# Altium PCB UI_PCB.PcbDoc (part 4 of 5)
Units mm, origin at the board's own origin, x right, y up, seen from the top; angles counter-clockwise.
Board outline 164.97 x 129.99 mm, 4 copper layers (SIG/PWR1, GND1, GNS2, SIG/PWR2), stack 1.18 mm thick; 237 components, 216 nets, 913 pads, 655 vias.
Unrouted connection lines stored in the file: 177.
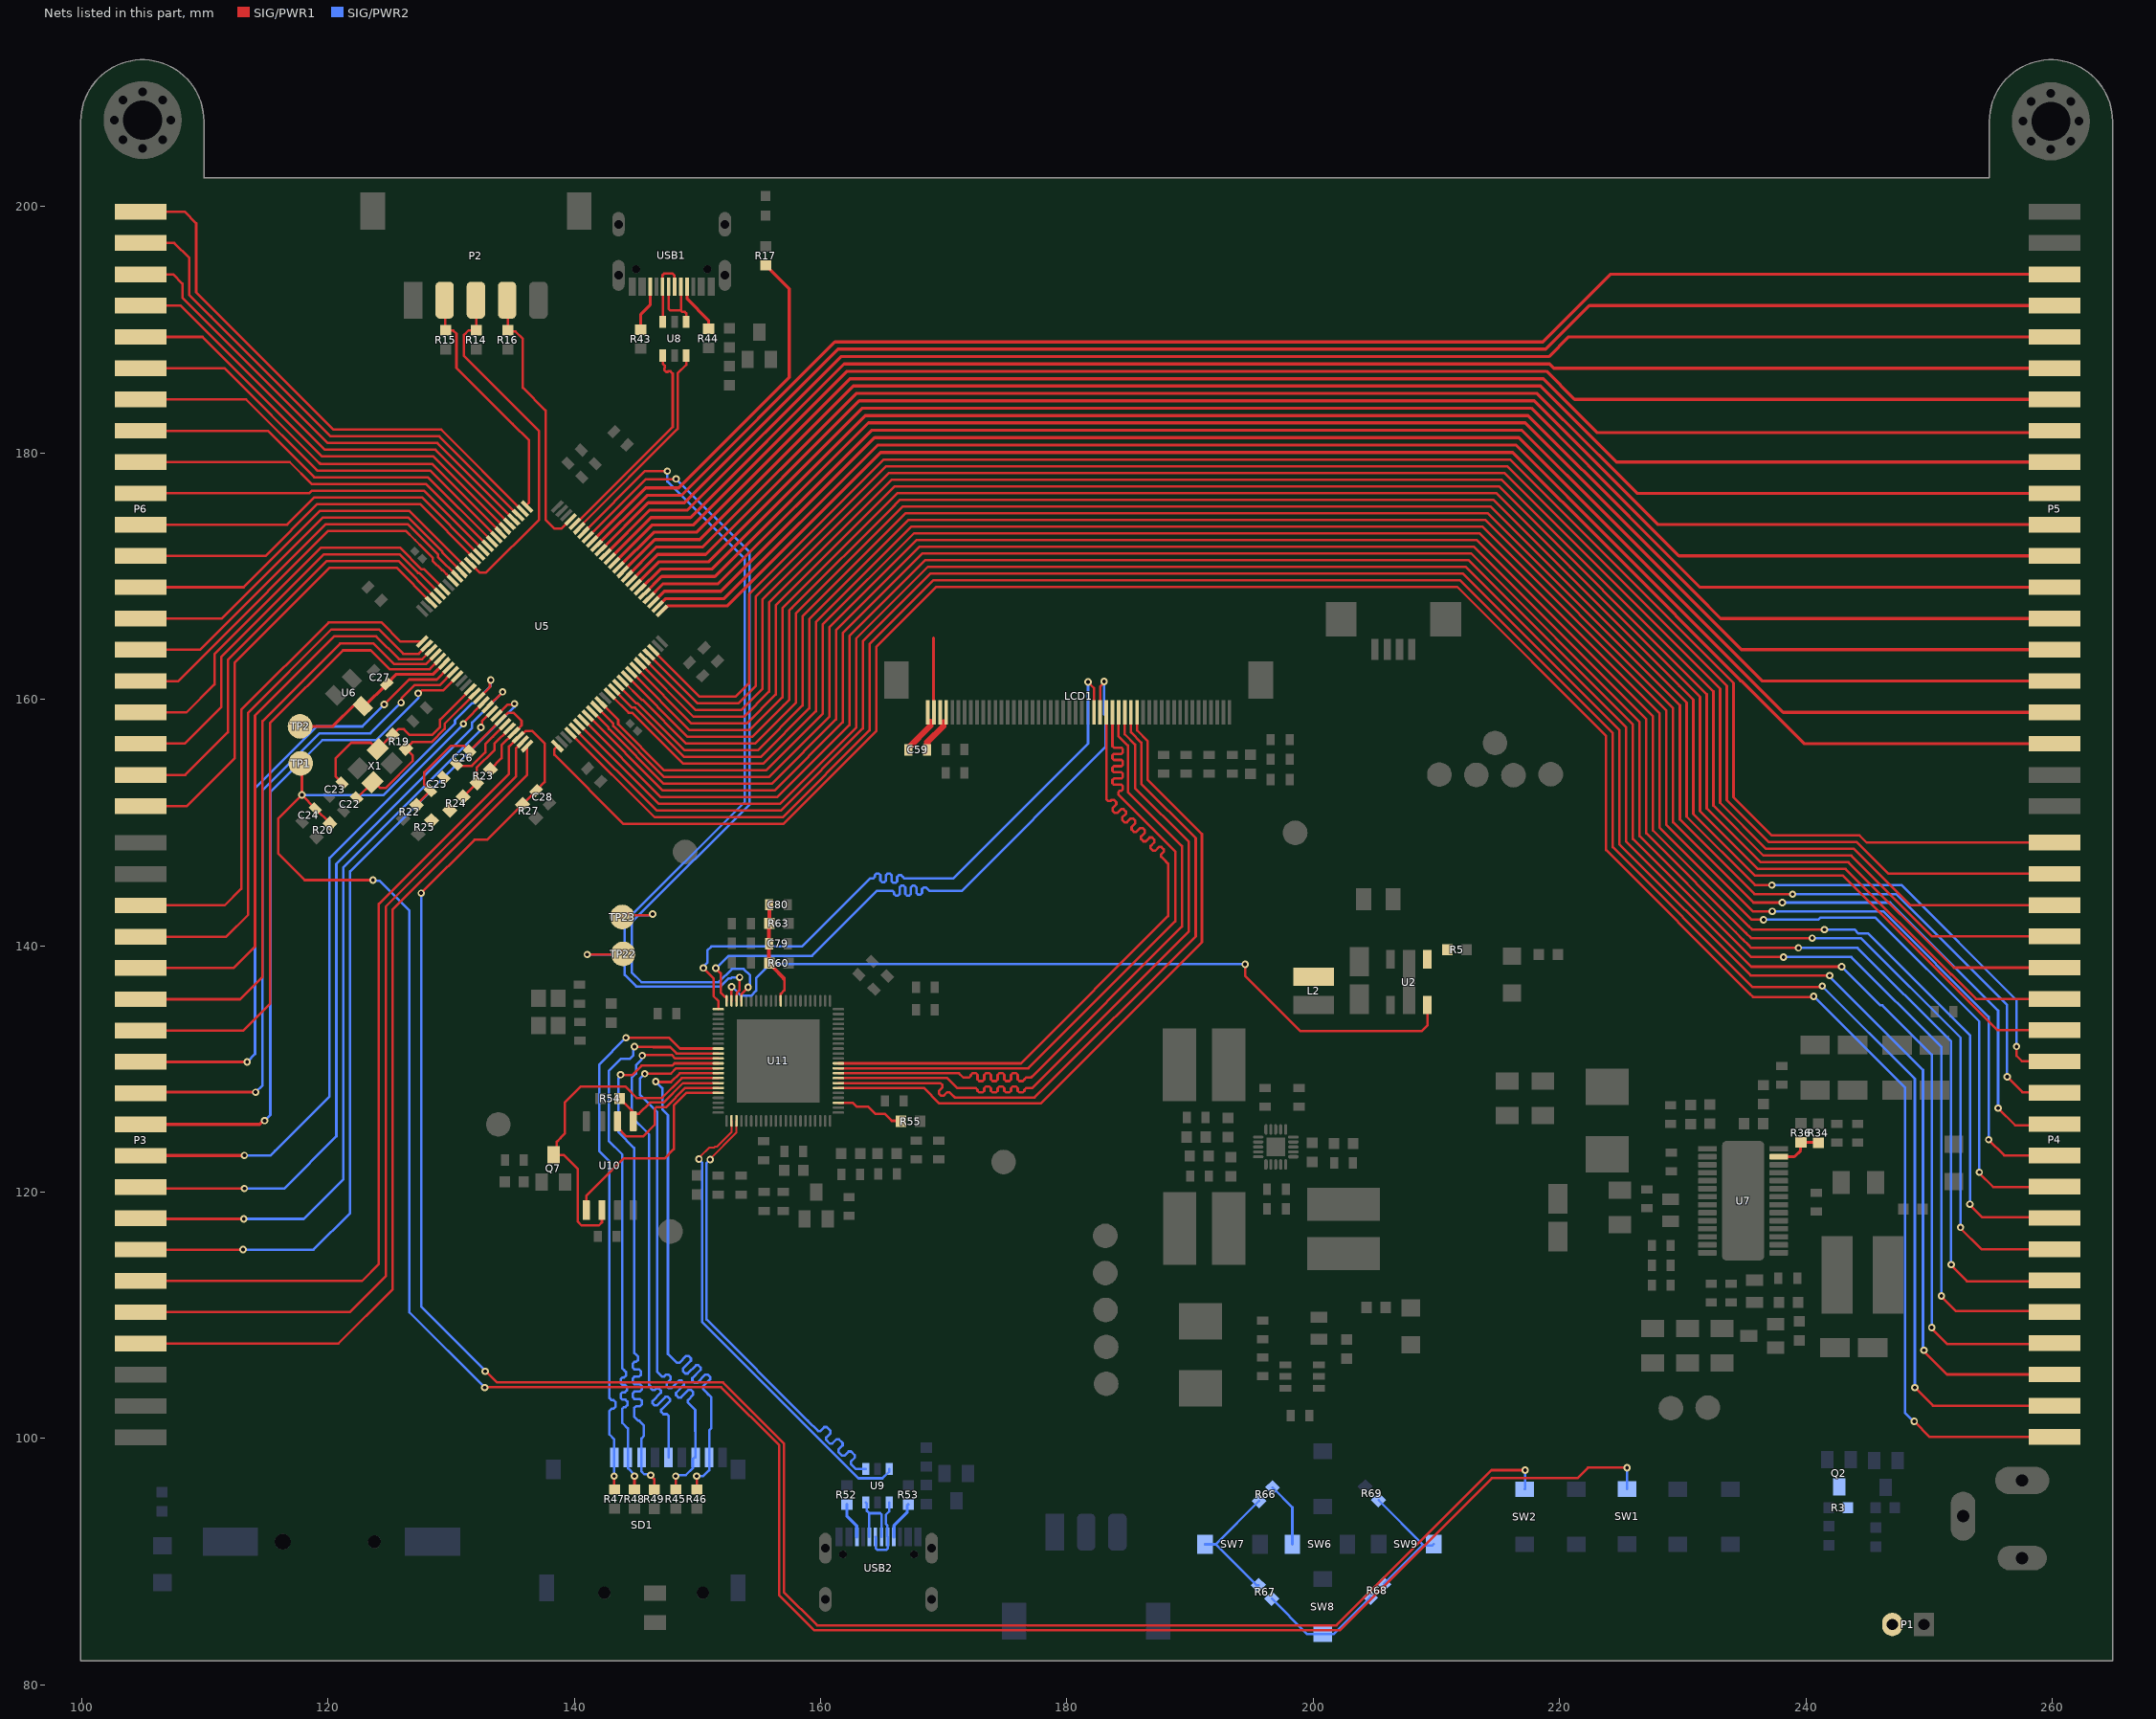
[diagram p5: the nets of this part, all layers, seen from the top]

## Via types
v1: diameter 0.6, hole 0.3, SIG/PWR1 to SIG/PWR2, tented both sides, 644 vias
v2: diameter 0.6, hole 0.3, SIG/PWR1 to SIG/PWR2, tented bottom, 10 vias
v3: diameter 0.8, hole 0.4, SIG/PWR1 to SIG/PWR2, tented both sides, 1 vias

## Nets (pads, with @x,y where several pads share a name; then routed paths per layer and width w, separated by ;. In a path a pad name is that pad's centre, name@x,y a point inside that pad or via, vN(x,y) a via of type N, cw(c..) or ccw(c..) an arc to the next point about the centre after c; other vN are vias at no path point) (continued)
NetR34_1: R34.1 R36.2 U7.13 | length 4.1
  SIG/PWR1 w0.254: U7.13@237.798,122.881 239.06,122.881 239.563,123.383 239.563,124.005 R36.2@239.598,124.041 240.995,124.041 R34.1@241.021,124.015
NetR43_1: R43.1 USB1.B5 | length 3.8
  SIG/PWR1 w0.254: R43.1@145.39,190.03 145.39,191.262 146.157,192.029 USB1.B5@146.157,193.509
NetR44_1: R44.1 USB1.A5 | length 4.2
  SIG/PWR1 w0.254: USB1.A5@149.157,193.509 149.157,192.514 150.901,190.769 R44.1@150.901,190.081
NetR52_1: R52.1 USB2.B5 | length 3
  SIG/PWR2 w0.254: R52.1@162.128,94.653 162.128,93.726 162.929,92.926 162.929,92.03 USB2.B5@162.946,92.013
NetR53_1: R53.1 USB2.A5 | length 3.1
  SIG/PWR2 w0.254: USB2.A5@165.946,92.013 165.957,92.024 165.957,92.932 167.021,93.996 167.021,94.567 R53.1@167.107,94.653
NetR55_2: R55.2 U11.3 | length 5.7
  SIG/PWR1 w0.2: U11.3@161.438,127.259 162.605,127.259 162.916,126.949 163.855,126.949 164.44,126.365 165.202,126.365 165.774,125.793 166.498,125.793 R55.2@166.535,125.755
NetR66_1: R66.1 SW6.1 | length 5.3
  SIG/PWR2 w0.2: R66.1@196.687,96.027 198.298,94.416 SW6.1@198.298,91.415
NetR66_2: R66.2 R67.1 SW7.1 | length 10.7
  SIG/PWR2 w0.2: SW7.1@191.211,91.415 192.075,91.415 ; R67.1@195.54,88.102 195.388,88.102 192.075,91.415 ; R66.2@195.591,94.931 192.075,91.415
NetR67_2: R67.2 R68.1 SW8.1 | length 10.4
  SIG/PWR2 w0.2: R67.2@196.636,87.006 199.517,84.125 SW8.1@200.762,84.125 201.651,84.125 R68.1@204.633,87.107
NetR68_2: R68.2 R69.1 SW9.1 | length 11.1
  SIG/PWR2 w0.2: R69.1@205.297,95.007 208.991,91.313 ; R68.2@205.729,88.203 208.839,91.313 208.991,91.313 ; SW9.1@209.525,91.313 208.991,91.313 ; SW9.1@209.779,91.44 209.652,91.313 208.991,91.313
PA0: C28.2 P3.15 R27.2 SW2.1 U5.23 | length 234.8
  SIG/PWR1 w0.2: P3.15@104.8,112.801 122.758,112.801 124.13,114.173 124.13,143.408 134.696,153.975 134.696,156.175 U5.23@135.444,156.923 135.529,156.923 136.061,157.455 136.576,157.455 137.589,156.442 137.589,153.297 C28.2@136.901,152.609 R27.2@135.783,151.491 132.907,148.615 131.902,148.615 v1(127.565,144.279) ; v1@132.791,105.486 133.728,104.549 152.068,104.549 157.02,99.598 157.02,87.526 159.71,84.836 201.88,84.836 214.479,97.434 v1(217.195,97.434)
  SIG/PWR2 w0.2: v1(127.565,144.279) 127.565,110.712 132.766,105.512 v1(132.766,105.461) ; SW2.1@217.17,95.885 217.195,95.91 v1(217.195,97.434)
PA1: P3.16 U5.24 | length 69.1
  SIG/PWR1 w0.2: P3.16@104.8,110.261 121.768,110.261 124.689,113.182 124.689,143.18 135.28,153.772 135.28,156.052 U5.24@135.798,156.569
PA2: P3.17 U5.25 | length 70.9
  SIG/PWR1 w0.2: P3.17@104.8,107.721 120.853,107.721 125.247,112.116 125.247,142.951 136.151,153.855 U5.25@136.151,156.215
PA3: P4.01 U5.26 | length 186.4
  SIG/PWR1 w0.2: U5.26@138.618,156.207 138.379,155.969 138.379,155.503 143.997,149.885 156.972,149.885 164.515,157.428 164.515,164.261 169.393,169.139 211.684,169.139 223.776,157.046 223.776,147.778 235.447,136.108 235.707,135.847 240.579,135.847 v1(240.63,135.899) ; v1(248.793,101.397) 250.063,100.127 P4.01@260.198,100.127
  SIG/PWR2 w0.2: v1(240.63,135.899) 248.031,128.497 248.031,102.108 248.742,101.397 v1(248.793,101.397)
PA4: P4.02 U5.29 | length 183.4
  SIG/PWR1 w0.2: U5.29@139.687,157.276 146.533,150.43 156.907,150.43 163.97,157.493 163.97,164.486 169.167,169.683 211.909,169.683 224.321,157.271 224.321,148.004 235.673,136.652 241.249,136.652 v1(241.325,136.728) ; v1(248.844,104.14) 250.317,102.667 P4.02@260.198,102.667
  SIG/PWR2 w0.2: v1(241.325,136.728) 248.844,129.21 v1(248.844,104.14)
PA5: P4.03 U5.30 | length 180.8
  SIG/PWR1 w0.2: U5.30@140.04,157.63 146.696,150.974 156.765,150.974 163.426,157.635 163.426,164.712 168.942,170.227 212.135,170.227 224.865,157.497 224.865,148.229 235.505,137.59 v1(241.933,137.59) ; v1(249.58,107.163) 249.58,107.086 251.46,105.207 P4.03@260.198,105.207
  SIG/PWR2 w0.2: v1(241.933,137.59) 241.933,137.492 249.504,129.921 249.504,107.163 v1(249.58,107.163)
PA6: P4.04 U5.31 | length 179.3
  SIG/PWR1 w0.2: U5.31@140.394,157.983 140.565,157.812 146.858,151.519 156.702,151.519 162.881,157.698 162.881,164.937 168.716,170.772 212.36,170.772 225.41,157.722 225.41,148.455 235.562,138.303 v1(242.9,138.303) ; v1(250.215,109.017) 250.215,108.941 251.485,107.671 260.121,107.671 P4.04@260.198,107.747
  SIG/PWR2 w0.2: v1(242.9,138.303) 246.037,135.166 246.206,135.166 250.215,131.157 v1(250.215,109.017)
PA7: P4.05 U5.32 | length 176.8
  SIG/PWR1 w0.2: U5.32@140.747,158.337 147.021,152.063 156.476,152.063 162.337,157.924 162.337,165.163 168.491,171.316 212.586,171.316 225.954,157.948 225.954,148.681 235.544,139.09 v1(238.176,139.09) ; v1(251.003,111.582) 251.003,111.506 252.171,110.338 260.147,110.338 P4.05@260.198,110.287
  SIG/PWR2 w0.2: v1(238.176,139.09) 243.688,139.09 251.003,131.775 v1(251.003,111.582)
PA15: P6.01 U5.77 | length 44.3
  SIG/PWR1 w0.2: P6.01@104.8,199.593 108.356,199.593 109.296,198.653 109.296,193.054 120.451,181.899 129.206,181.899 U5.77@135.798,175.307
PB0: P4.08 U5.35 | length 169.4
  SIG/PWR1 w0.2: U5.35@141.808,159.397 143.154,158.051 143.154,157.836 147.294,153.696 155.8,153.696 160.704,158.6 160.704,165.839 167.814,172.95 213.262,172.95 227.587,158.624 227.587,149.357 235.361,141.584 235.625,141.319 v1(241.503,141.319) ; v1(253.314,119.024) 253.314,118.948 254.305,117.958 260.147,117.958 P4.08@260.198,117.907
  SIG/PWR2 w0.2: v1(241.503,141.319) 243.948,141.319 244.272,140.995 245.059,140.995 253.314,132.74 v1(253.314,119.024)
PB1: P4.09 U5.36 | length 167.5
  SIG/PWR1 w0.2: U5.36@142.162,159.751 143.561,158.352 143.561,157.988 147.308,154.241 155.574,154.241 160.159,158.826 160.159,166.065 167.589,173.494 213.488,173.494 228.132,158.85 228.132,149.583 235.586,142.128 236.553,142.128 v1(236.553,142.118) ; v1(254.076,121.615) 254.076,121.539 255.194,120.421 260.172,120.421 P4.09@260.198,120.447
  SIG/PWR2 w0.2: v1@236.558,142.123 236.563,142.118 241.002,142.118 241.187,142.303 245.631,142.303 254.076,133.858 v1(254.076,121.615)
PB4: P6.13 U5.90 | length 30.9
  SIG/PWR1 w0.2: P6.13@104.8,169.113 113.152,169.113 119.358,175.318 126.594,175.318 U5.90@131.201,170.711
PB5: P6.14 U5.91 | length 31.3
  SIG/PWR1 w0.2: P6.14@104.8,166.573 111.382,166.573 119.583,174.774 126.516,174.774 129.286,172.004 129.286,171.919 U5.91@130.848,170.358
PB6: P6.15 U5.92 | length 31.8
  SIG/PWR1 w0.2: P6.15@104.8,164.033 109.612,164.033 119.809,174.23 126.481,174.23 128.93,171.78 128.93,171.568 U5.92@130.494,170.004
PB7: P6.16 U5.93 | length 32.2
  SIG/PWR1 w0.2: P6.16@104.8,161.493 107.842,161.493 110.232,163.883 120.034,173.685 125.984,173.685 126.325,173.685 127.07,172.94 127.712,172.298 128.499,171.511 128.499,171.245 129.247,170.497 129.295,170.497 129.611,170.18 129.931,169.86 U5.93@130.141,169.651
PB8: P6.17 U5.95 | length 33
  SIG/PWR1 w0.2: P6.17@104.8,158.953 108.509,158.953 110.776,161.221 110.776,163.657 119.44,172.321 125.849,172.321 127.61,170.561 127.816,170.561 U5.95@129.434,168.943
PB9: P6.18 U5.96 | length 34.3
  SIG/PWR1 w0.2: P6.18@104.8,156.413 108.356,156.413 111.321,159.377 111.321,163.432 119.666,171.777 125.632,171.777 125.808,171.777 127.316,170.269 127.401,170.269 U5.96@129.08,168.59
PB10: P4.19 U5.47 | length 147.1
  SIG/PWR1 w0.2: U5.47@146.051,163.64 150.006,159.685 153.319,159.685 154.715,161.081 154.715,168.32 165.333,178.938 215.743,178.938 233.576,161.105 233.576,151.838 236.997,148.417 244.129,148.417 246.699,145.847 P4.19@260.198,145.847
PB11: P4.20 U5.48 | length 145.9
  SIG/PWR1 w0.2: U5.48@146.404,163.994 150.168,160.229 153.094,160.229 154.171,161.306 154.171,168.545 165.108,179.483 215.968,179.483 234.12,161.33 234.12,152.063 237.223,148.961 244.355,148.961 244.929,148.387 P4.20@260.198,148.387
PB12: P5.03 U5.51 | length 128.2
  SIG/PWR1 w0.254: U5.51@147.111,167.176 147.158,167.176 147.572,167.589 152.406,167.589 164.871,180.054 213.557,180.054 216.205,180.054 224.151,172.108 234.692,161.567 234.692,161.515 234.744,161.515 235.963,160.296 239.846,156.413 P5.03@260.198,156.413
PB13: P5.04 U5.52 | length 127.9
  SIG/PWR1 w0.254: U5.52@146.758,167.529 147.416,168.188 152.159,168.188 164.623,180.652 213.805,180.652 216.453,180.652 224.75,172.355 234.992,162.113 236.211,160.895 238.152,158.953 P5.04@260.198,158.953
PB14: P5.05 U5.53 | length 127.5
  SIG/PWR1 w0.254: U5.53@146.404,167.883 147.308,168.786 151.911,168.786 164.376,181.251 214.053,181.251 216.701,181.251 223.541,174.411 230.634,167.318 235.24,162.711 236.458,161.493 P5.05@260.198,161.493
PB15: P5.06 U5.54 | length 127.2
  SIG/PWR1 w0.254: U5.54@146.051,168.236 147.199,169.384 151.663,169.384 164.128,181.849 216.949,181.849 224.139,174.659 234.765,164.033 P5.06@260.198,164.033
PC0: P3.11 U5.15 | length 54.5
  SIG/PWR1 w0.2: v1(130.995,158.019) 130.995,158.13 U5.15@132.616,159.751
  SIG/PWR1 w0.254: P3.11@104.8,122.961 104.826,122.987 v1(113.208,122.987)
  SIG/PWR2 w0.2: v1(113.208,122.987) 115.341,122.987 115.706,123.351 120.117,127.762 120.117,147.14 v1(130.995,158.019)
PC1: P3.12 U5.16 | length 61.1
  SIG/PWR1 w0.2: P3.12@104.8,120.421 104.927,120.294 v1(113.208,120.294) ; U5.16@132.969,159.397 132.969,159.404 v1@134.18,160.615
  SIG/PWR2 w0.2: v1(113.208,120.294) 116.434,120.294 120.675,124.536 120.675,146.66 131.699,157.683 131.699,158.132 v1(134.182,160.615)
PC2: P3.13 U5.17 | length 60.5
  SIG/PWR1 w0.2: v1@132.436,157.785 132.502,157.851 132.502,158.223 U5.17@133.323,159.044
  SIG/PWR1 w0.254: P3.13@104.8,117.881 104.851,117.831 v1(113.157,117.831)
  SIG/PWR2 w0.2: v1(113.157,117.831) 118.034,117.831 121.234,121.031 121.234,146.355 v1@132.379,157.5
  other v1: 132.41,157.734
PC3: P3.14 U5.18 | length 67
  SIG/PWR1 w0.2: P3.14@104.8,115.341 v1(113.106,115.341) ; U5.18@133.676,158.69 134.568,159.582 135.076,159.582 v1(135.142,159.648)
  SIG/PWR2 w0.2: v1(113.106,115.341) 118.821,115.341 121.793,118.313 121.793,146.05 135.142,159.399 v1(135.142,159.648)
PC4: P4.06 U5.33 | length 174.4
  SIG/PWR1 w0.2: U5.33@141.101,158.69 147.184,152.608 156.251,152.608 161.792,158.149 161.792,165.388 168.265,171.861 212.811,171.861 226.499,158.173 226.499,148.906 234.283,141.121 234.91,140.495 235.326,140.079 235.574,139.831 v1(239.39,139.831) ; v1(251.79,114.122) 251.79,114.046 253.06,112.776 260.147,112.776 P4.06@260.198,112.827
  SIG/PWR2 w0.2: v1(239.39,139.831) 244.192,139.831 251.79,132.232 v1(251.79,114.122)
PC5: P4.07 U5.34 | length 171.6
  SIG/PWR1 w0.2: U5.34@141.454,159.044 142.773,157.725 142.773,157.658 142.804,157.627 142.804,157.614 147.267,153.152 156.025,153.152 161.248,158.375 161.248,165.614 168.04,172.405 213.037,172.405 227.043,158.399 227.043,149.132 235.135,141.039 235.552,140.623 v1(240.513,140.623) ; v1(252.552,117.145) 252.552,117.069 254.254,115.367 P4.07@260.198,115.367
  SIG/PWR2 w0.2: v1(240.513,140.623) 244.466,140.623 252.552,132.537 v1(252.552,117.145)
PC6: P5.15 U5.63 | length 124
  SIG/PWR1 w0.254: U5.63@142.869,171.418 146.221,174.77 149.432,174.77 161.897,187.235 219.179,187.235 219.521,186.893 P5.15@260.198,186.893
PC7: P5.16 U5.64 | length 125
  SIG/PWR1 w0.254: U5.64@142.515,171.772 146.112,175.369 149.184,175.369 161.649,187.834 219.126,187.834 220.726,189.433 P5.16@260.198,189.433
PC8: P5.17 U5.65 | length 126.3
  SIG/PWR1 w0.254: U5.65@142.162,172.125 146.003,175.967 148.936,175.967 161.401,188.432 161.528,188.432 218.879,188.432 222.42,191.973 P5.17@260.198,191.973
PC9: P5.18 U5.66 | length 127.5
  SIG/PWR1 w0.254: U5.66@141.808,172.479 145.895,176.566 148.688,176.566 161.153,189.03 218.631,189.03 224.113,194.513 P5.18@260.198,194.513
PC10: P6.02 U5.78 | length 41.6
  SIG/PWR1 w0.2: P6.02@104.8,197.053 107.518,197.053 108.737,195.834 108.737,192.827 110.498,191.066 110.514,191.066 120.226,181.355 129.043,181.355 U5.78@135.444,174.954
PC11: P6.03 U5.79 | length 39.2
  SIG/PWR1 w0.2: P6.03@104.8,194.513 107.417,194.513 108.179,193.751 108.179,192.608 119.976,180.811 128.88,180.811 U5.79@135.091,174.6
PC12: P6.04 U5.80 | length 37.3
  SIG/PWR1 w0.2: P6.04@104.8,191.973 108.044,191.973 119.751,180.266 120.202,180.266 128.718,180.266 U5.80@134.737,174.247
PC13: P3.08 U5.7 | length 50.9
  SIG/PWR1 w0.2: v1@124.562,159.592 126.584,161.615 128.823,161.615 U5.7@129.783,162.575
  SIG/PWR1 w0.254: P3.08@104.8,130.581 v1(113.436,130.581)
  SIG/PWR2 w0.2: v1(113.436,130.581) 114.071,131.216 114.071,152.806 119.075,157.81 122.784,157.81 v1(124.562,159.588)
PC14: P3.09 U5.8 | length 53.7
  SIG/PWR1 w0.2: v1@125.933,159.745 125.991,159.802 125.991,160.134 127.04,161.183 129.094,161.183 U5.8@130.137,162.226
  SIG/PWR1 w0.254: P3.09@104.8,128.041 104.877,128.118 v1(114.122,128.118)
  SIG/PWR2 w0.2: v1(114.122,128.118) 114.681,128.676 114.681,152.629 119.304,157.251 123.444,157.251 v1(125.933,159.741)
PC15: P3.10 U5.9 | length 56.3
  SIG/PWR1 w0.2: v1(127.326,160.502) 127.395,160.502 127.644,160.751 129.369,160.751 U5.9@130.49,161.872
  SIG/PWR1 w0.254: P3.10@104.8,125.501 114.46,125.501 114.765,125.806 v1(114.859,125.806)
  SIG/PWR2 w0.2: v1(114.859,125.806) 115.316,126.263 115.316,152.476 119.532,156.693 123.901,156.693 127.326,160.117 v1(127.326,160.502)
PD0: P6.05 U5.81 | length 36
  SIG/PWR1 w0.2: P6.05@104.8,189.433 109.814,189.433 119.525,179.722 120.427,179.722 128.555,179.722 U5.81@134.383,173.893
PD1: P6.06 U5.82 | length 34.8
  SIG/PWR1 w0.2: P6.06@104.8,186.893 111.584,186.893 119.3,179.177 119.324,179.177 119.371,179.129 128.44,179.129 U5.82@134.03,173.54
PD2: P6.07 U5.83 | length 33.5
  SIG/PWR1 w0.2: P6.07@104.8,184.353 113.354,184.353 119.074,178.633 119.081,178.633 119.128,178.585 128.277,178.585 U5.83@133.676,173.186
PD3: P6.08 U5.84 | length 32.2
  SIG/PWR1 w0.2: P6.08@104.8,181.813 115.113,181.813 117.108,179.818 117.116,179.818 118.893,178.041 128.115,178.041 U5.84@133.323,172.832
PD4: P6.09 U5.85 | length 31
  SIG/PWR1 w0.2: P6.09@104.8,179.273 116.891,179.273 118.668,177.496 127.952,177.496 U5.85@132.969,172.479
PD5: P6.10 U5.86 | length 29.9
  SIG/PWR1 w0.2: P6.10@104.8,176.733 118.463,176.733 118.681,176.952 127.789,176.952 U5.86@132.616,172.125
PD6: P6.11 U5.87 | length 30.3
  SIG/PWR1 w0.2: P6.11@104.8,174.193 116.692,174.193 118.907,176.407 127.627,176.407 U5.87@132.262,171.772
PD7: P6.12 U5.88 | length 30.7
  SIG/PWR1 w0.2: P6.12@104.8,171.653 114.922,171.653 119.132,175.863 127.464,175.863 U5.88@131.908,171.418
PD8: P5.07 U5.55 | length 126.8
  SIG/PWR1 w0.254: U5.55@145.697,168.59 147.09,169.983 151.415,169.983 163.88,182.448 216.394,182.448 217.196,182.448 231.129,168.515 233.071,166.573 P5.07@260.198,166.573
PD9: P5.08 U5.56 | length 126.5
  SIG/PWR1 w0.254: U5.56@145.344,168.943 146.981,170.581 151.167,170.581 163.632,183.046 217.444,183.046 221.829,178.662 221.93,178.561 229.436,171.055 231.377,169.113 P5.08@260.198,169.113
PD10: P5.09 U5.57 | length 126.1
  SIG/PWR1 w0.254: U5.57@144.99,169.297 146.873,171.18 150.919,171.18 163.384,183.645 217.692,183.645 222.077,179.26 222.528,178.809 227.742,173.595 229.684,171.653 P5.09@260.198,171.653
PD11: P5.10 U5.58 | length 125.8
  SIG/PWR1 w0.254: U5.58@144.636,169.651 146.764,171.778 150.671,171.778 163.136,184.243 217.94,184.243 218.785,183.398 222.325,179.858 223.127,179.057 227.99,174.193 P5.10@260.198,174.193
PD12: P5.11 U5.59 | length 125.4
  SIG/PWR1 w0.254: U5.59@144.283,170.004 146.655,172.377 150.423,172.377 162.888,184.841 217.386,184.841 218.188,184.841 222.573,180.457 223.725,179.304 226.296,176.733 P5.11@260.198,176.733
PD13: P5.12 U5.60 | length 125.1
  SIG/PWR1 w0.254: U5.60@143.929,170.358 146.547,172.975 150.176,172.975 162.64,185.44 215.788,185.44 218.436,185.44 222.82,181.055 224.602,179.273 P5.12@260.198,179.273
PD14: P5.13 U5.61 | length 124.9
  SIG/PWR1 w0.254: U5.61@143.576,170.711 146.438,173.573 149.928,173.573 162.393,186.038 216.036,186.038 218.684,186.038 223.068,181.654 260.038,181.654 P5.13@260.198,181.813
PD15: P5.14 U5.62 | length 124.4
  SIG/PWR1 w0.254: U5.62@143.222,171.065 146.329,174.172 149.68,174.172 162.145,186.637 218.13,186.637 218.932,186.637 221.215,184.353 P5.14@260.198,184.353
PE0: P6.19 U5.97 | length 35.8
  SIG/PWR1 w0.2: P6.19@104.8,153.873 108.407,153.873 111.865,157.331 111.865,163.206 119.891,171.232 125.73,171.232 U5.97@128.727,168.236
PE1: P6.20 U5.98 | length 37.3
  SIG/PWR1 w0.2: P6.20@104.8,151.333 108.534,151.333 112.409,155.208 112.409,162.981 120.117,170.688 125.568,170.688 U5.98@128.373,167.883
PE2: P3.03 U5.1 | length 41.5
  SIG/PWR1 w0.2: P3.03@104.8,143.281 111.608,143.281 112.954,144.628 112.954,159.156 120.04,166.243 124.358,166.243 125.901,164.701 U5.1@127.666,164.701
PE3: P3.04 U5.2 | length 44.2
  SIG/PWR1 w0.2: P3.04@104.8,140.741 111.735,140.741 113.513,142.519 113.513,158.928 120.269,165.684 124.13,165.684 126.111,163.703 127.375,163.703 U5.2@128.019,164.347
PE4: P3.05 U5.3 | length 46.8
  SIG/PWR1 w0.2: P3.05@104.8,138.201 112.319,138.201 114.071,139.954 114.071,158.699 120.498,165.125 123.901,165.125 125.755,163.271 127.65,163.271 U5.3@128.373,163.994
PE5: P3.06 U5.4 | length 49.1
  SIG/PWR1 w0.2: P3.06@104.8,135.661 112.852,135.661 114.681,137.49 114.681,158.242 120.98,164.541 123.698,164.541 125.374,162.865 127.951,162.865 U5.4@128.727,163.64
PE6: P3.07 U5.5 | length 51.4
  SIG/PWR1 w0.2: P3.07@104.8,133.121 113.132,133.121 115.291,135.28 115.291,158.064 121.209,163.982 123.469,163.982 124.993,162.458 128.252,162.458 U5.5@129.08,163.287
PE7: P4.10 U5.38 | length 164.3
  SIG/PWR1 w0.2: U5.38@142.869,160.458 143.053,160.274 144.399,158.928 144.693,158.928 148.836,154.785 155.349,154.785 159.615,159.051 159.615,166.29 167.363,174.038 213.713,174.038 228.676,159.075 228.676,149.808 235.685,142.799 v1(237.261,142.799) ; v1(254.838,124.257) 256.108,122.987 P4.10@260.198,122.987
  SIG/PWR2 w0.2: v1(237.261,142.799) 246.278,142.799 254.838,134.239 v1(254.838,124.257)
PE8: P4.11 U5.39 | length 161.9
  SIG/PWR1 w0.2: U5.39@143.222,160.812 144.7,159.334 144.932,159.334 148.937,155.33 155.123,155.33 159.07,159.277 159.07,166.516 167.138,174.583 213.939,174.583 229.221,159.301 229.221,150.034 235.744,143.51 v1(238.074,143.51) ; v1(255.6,126.822) 256.997,125.425 260.096,125.425 P4.11@260.198,125.527
  SIG/PWR2 w0.2: v1(238.074,143.51) 246.837,143.51 255.6,134.747 v1(255.6,126.822)
PE9: P4.12 U5.40 | length 159.4
  SIG/PWR1 w0.2: U5.40@143.576,161.165 145.051,159.69 145.136,159.69 148.952,155.874 154.898,155.874 158.526,159.502 158.526,166.741 166.912,175.127 214.164,175.127 229.765,159.526 229.765,150.259 235.828,144.196 v1(238.912,144.196) ; v1(256.337,129.362) 257.581,128.118 260.147,128.118 P4.12@260.198,128.067
  SIG/PWR2 w0.2: v1(238.912,144.196) 247.345,144.196 256.337,135.204 v1(256.337,129.362)
PE10: P4.13 U5.41 | length 157.4
  SIG/PWR1 w0.2: U5.41@143.929,161.519 145.479,159.969 145.542,159.969 149.093,156.418 154.672,156.418 157.981,159.728 157.981,166.967 166.687,175.672 214.39,175.672 230.31,159.752 230.31,150.485 235.862,144.932 v1(237.236,144.932) ; v1(257.099,131.826) 257.099,131.064 257.531,130.632 260.121,130.632 260.172,130.581 P4.13@260.198,130.607
  SIG/PWR2 w0.2: v1(237.236,144.932) 247.752,144.932 257.099,135.585 v1(257.099,131.826)
PE11: P4.14 U5.42 | length 153.4
  SIG/PWR1 w0.2: U5.42@144.283,161.872 149.192,156.963 154.447,156.963 156.87,159.386 156.924,159.44 156.978,159.494 157.005,159.521 157.437,159.953 157.437,167.192 157.673,167.428 165.926,175.681 165.958,175.713 166.023,175.778 166.461,176.216 214.16,176.216 214.615,176.216 229.729,161.103 230.854,159.977 230.854,151.512 230.854,150.71 235.87,145.694 243.002,145.694 255.549,133.147 P4.14@260.198,133.147
PE12: P4.15 U5.43 | length 152.2
  SIG/PWR1 w0.2: U5.43@144.636,162.226 149.357,157.505 154.219,157.505 156.893,160.179 156.893,167.418 166.236,176.761 214.841,176.761 220.858,170.743 231.398,160.203 231.398,150.936 236.095,146.239 243.227,146.239 251.784,137.682 251.822,137.682 253.818,135.687 P4.15@260.198,135.687
PE13: P4.16 U5.44 | length 150.9
  SIG/PWR1 w0.2: U5.44@144.99,162.579 149.518,158.052 153.996,158.052 156.348,160.404 156.348,167.643 166.01,177.305 215.066,177.305 231.943,160.428 231.943,151.161 236.321,146.783 243.453,146.783 252.009,138.227 P4.16@260.198,138.227
PE14: P4.17 U5.45 | length 149.7
  SIG/PWR1 w0.2: U5.45@145.344,162.933 149.68,158.596 153.77,158.596 155.804,160.63 155.804,167.869 165.784,177.849 215.292,177.849 232.487,160.654 232.487,151.387 236.546,147.328 243.678,147.328 250.239,140.767 P4.17@260.198,140.767
PE15: P4.18 U5.46 | length 148.4
  SIG/PWR1 w0.2: U5.46@145.697,163.287 149.843,159.141 153.545,159.141 155.259,160.855 155.259,168.094 165.559,178.394 215.517,178.394 233.032,160.879 233.032,151.612 236.772,147.872 243.904,147.872 248.469,143.307 P4.18@260.198,143.307
PRE_USB1_N: U8.1 USB1.A7 USB1.B7 | length 6
  SIG/PWR1 w0.199: USB1.A7@147.657,193.509 147.67,193.496 147.67,191.698 147.787,191.582 148.657,191.582 ; USB1.B7@148.657,193.509 148.657,191.582 ; U8.1@149.083,190.646 149.083,191.349 148.966,191.465 148.774,191.465 148.657,191.582
PRE_USB1_P: U8.3 USB1.A6 USB1.B6 | length 5.8
  SIG/PWR1 w0.199: U8.3@147.183,190.646 147.183,193.483 USB1.B6@147.157,193.509 147.157,194.447 147.274,194.564 147.972,194.564 148.13,194.406 148.13,193.536 USB1.A6@148.157,193.509
PRE_USB2_N: U9.1 USB2.A7 USB2.B7 | length 5.9
  SIG/PWR2 w0.199: USB2.A7@164.446,92.013 164.474,91.985 164.474,91.116 164.632,90.957 165.33,90.957 165.446,91.074 USB2.B7@165.446,92.013 165.404,92.055 165.404,92.965 165.295,93.073 165.295,93.82 165.567,94.092 U9.1@165.567,94.799
PRE_USB2_P: U9.3 USB2.A6 USB2.B6 | length 5.8
  SIG/PWR2 w0.199: U9.3@163.667,94.799 163.758,94.709 163.758,94.128 163.946,93.94 ; USB2.B6@163.946,92.013 163.946,93.94 ; USB2.A6@164.946,92.013 164.946,93.823 164.83,93.94 163.946,93.94
PWM: U2.3 U11.43 | length 64.2
  SIG/PWR1 w0.2: U11.43@152.763,135.534 152.763,135.972 v1(152.766,136.672) ; v1(194.462,138.506) 194.462,137.566 198.933,133.096 208.823,133.096 209.266,133.538 U2.3@209.266,135.199
  SIG/PWR2 w0.2: v1(152.766,136.672) 152.826,136.672 153.557,135.941 154.343,135.941 154.758,136.356 154.758,137.384 155.88,138.506 v1(194.462,138.506)
R0: LCD1.28 U11.45 | length 53.5
  SIG/PWR1 w0.2: v1(150.47,138.201) 151.308,137.363 151.308,135.915 151.688,135.536 U11.45@151.688,134.859 ; v1(181.712,161.417) 182.192,160.936 LCD1.28@182.192,158.877
  SIG/PWR2 w0.2: v1(150.47,138.201) 150.47,138.31 150.793,138.633 150.793,139.628 151.12,139.954 158.496,139.954 164.008,145.466 164.159,145.466 164.259,145.466 164.396,145.602 164.396,145.73 164.532,145.866 164.713,145.866 164.85,145.73 164.85,145.312 164.986,145.176 165.167,145.176 165.304,145.312 165.304,145.73 165.44,145.866 165.621,145.866 165.758,145.73 165.758,145.253 165.894,145.116 166.075,145.116 166.212,145.253 166.212,145.602 166.348,145.738 166.529,145.738 166.666,145.602 166.802,145.466 169.875,145.466 170.764,145.466 181.712,156.413 v1(181.712,161.417)
R1: LCD1.29 U11.44 | length 53.6
  SIG/PWR1 w0.2: v1(151.478,138.183) 151.892,137.77 151.892,136.194 152.234,135.852 152.363,135.852 U11.44@152.363,135.534 ; LCD1.29@182.693,158.877 182.693,161.046 183.007,161.36 v1(183.007,161.468)
  SIG/PWR2 w0.2: v1(151.478,138.183) 151.516,138.183 152.525,139.192 159.309,139.192 164.592,144.475 165.272,144.475 165.826,144.475 165.963,144.339 165.963,144.211 166.099,144.075 166.28,144.075 166.417,144.211 166.417,144.739 166.553,144.875 166.734,144.875 166.871,144.739 166.871,144.211 167.007,144.075 167.188,144.075 167.325,144.211 167.325,144.739 167.461,144.875 167.642,144.875 167.779,144.739 167.779,144.29 167.915,144.154 168.096,144.154 168.233,144.29 168.233,144.611 168.369,144.748 168.55,144.748 168.687,144.611 168.823,144.475 169.904,144.475 171.475,144.475 183.124,156.124 183.124,158.683 183.007,158.8 v1(183.007,161.468)
R2: LCD1.30 U11.11 | length 56.4
  SIG/PWR1 w0.2: U11.11@161.438,130.459 176.256,130.459 188.214,142.418 188.214,146.66 188.1,146.774 188.029,146.845 187.644,147.229 187.644,147.422 187.861,147.639 187.861,147.831 187.669,148.023 187.477,148.023 187.17,147.716 186.978,147.716 186.785,147.909 186.785,148.101 187.092,148.408 187.092,148.6 186.9,148.793 186.707,148.793 186.401,148.486 186.208,148.486 186.016,148.678 186.016,148.87 186.323,149.177 186.323,149.37 186.13,149.562 185.938,149.562 185.631,149.255 185.439,149.255 185.247,149.447 185.247,149.64 185.553,149.946 185.553,150.139 185.361,150.331 185.169,150.331 184.862,150.024 184.67,150.024 184.477,150.217 184.477,150.409 184.784,150.716 184.784,150.908 184.592,151.1 184.399,151.1 184.093,150.794 183.9,150.794 183.708,150.986 183.708,151.178 184.005,151.475 184.005,151.667 183.812,151.86 183.62,151.86 183.521,151.76 183.328,151.76 183.192,151.896 183.192,152.127 LCD1.30@183.192,158.953
R3: LCD1.31 U11.10 | length 56.3
  SIG/PWR1 w0.2: U11.10@161.438,130.059 176.872,130.059 188.798,141.986 188.798,147.65 184.463,151.985 184.165,152.284 184.165,152.46 184.29,152.585 184.418,152.585 184.543,152.71 184.543,152.96 184.418,153.085 183.817,153.085 183.692,153.21 183.692,153.46 183.817,153.585 184.418,153.585 184.543,153.71 184.543,153.96 184.418,154.085 183.817,154.085 183.692,154.21 183.692,154.46 183.817,154.585 184.418,154.585 184.543,154.71 184.543,154.96 184.418,155.085 183.817,155.085 183.692,155.21 183.692,155.46 183.817,155.585 184.418,155.585 184.543,155.71 184.543,155.96 184.418,156.085 183.817,156.085 183.692,156.21 183.692,156.328 LCD1.31@183.692,158.953
R4: LCD1.32 U11.9 | length 56.3
  SIG/PWR1 w0.2: U11.9@161.438,129.659 171.229,129.659 171.577,129.311 171.958,129.311 172.058,129.311 172.194,129.447 172.194,129.525 172.33,129.661 172.602,129.661 172.738,129.525 172.738,129.156 172.874,129.02 173.146,129.02 173.282,129.156 173.282,129.525 173.418,129.661 173.69,129.661 173.826,129.525 173.826,129.156 173.962,129.02 174.234,129.02 174.37,129.156 174.37,129.525 174.506,129.661 174.778,129.661 174.914,129.525 174.914,129.156 175.05,129.02 175.322,129.02 175.458,129.156 175.458,129.525 175.594,129.661 175.866,129.661 176.002,129.525 176.002,129.156 176.138,129.02 176.41,129.02 176.546,129.156 176.546,129.175 176.682,129.311 177.089,129.311 177.151,129.374 189.332,141.554 189.332,148.107 184.941,152.498 184.941,156.258 184.192,157.006 LCD1.32@184.192,158.953
R5: LCD1.33 U11.8 | length 56.2
  SIG/PWR1 w0.2: U11.8@161.438,129.259 170.283,129.259 171.094,128.448 171.957,128.448 172.601,128.448 172.737,128.312 172.737,128.24 172.873,128.104 173.145,128.104 173.281,128.24 173.281,128.439 173.417,128.575 173.689,128.575 173.825,128.439 173.825,128.24 173.961,128.104 174.233,128.104 174.369,128.24 174.369,128.439 174.505,128.575 174.777,128.575 174.913,128.439 174.913,128.24 175.049,128.104 175.321,128.104 175.457,128.24 175.457,128.439 175.593,128.575 175.865,128.575 176.001,128.439 176.001,128.24 176.137,128.104 176.409,128.104 176.545,128.24 176.545,128.312 176.681,128.448 177.099,128.448 177.165,128.448 189.89,141.173 189.89,148.438 185.522,152.806 185.522,156.337 184.692,157.166 LCD1.33@184.692,158.953
R6: LCD1.34 U11.7 | length 56.3
  SIG/PWR1 w0.2: U11.7@161.438,128.859 169.334,128.859 169.718,128.859 169.885,128.692 169.885,128.5 169.603,128.218 169.603,128.025 169.795,127.833 169.988,127.833 170.27,128.115 170.462,128.115 170.767,127.81 170.837,127.74 170.891,127.686 177.368,127.686 190.449,140.767 190.449,148.742 186.03,153.162 186.03,156.489 185.192,157.327 LCD1.34@185.192,158.953
R7: LCD1.35 U11.6 | length 56.3
  SIG/PWR1 w0.2: U11.6@161.438,128.459 168.39,128.459 169.647,127.203 177.876,127.203 179.779,129.106 190.957,140.284 190.957,149.073 186.563,153.467 186.563,156.616 185.692,157.487 LCD1.35@185.692,158.953
RX: TP22.1 U5.69 U11.42 | length 74.5
  SIG/PWR1 w0.2: U5.69@140.747,173.54 145.744,178.537 v1(147.549,178.537) ; v1(141.046,139.294) 143.916,139.294 TP22.1@143.967,139.344 ; U11.42@153.163,135.534 153.163,136.042 153.213,136.092 153.213,136.195 153.373,136.355 153.373,136.369 153.415,136.411 153.42,136.422 v1(153.42,137.44)
  SIG/PWR2 w0.2: v1(141.046,139.294) 144.094,139.294 ; v1(147.549,178.537) 147.549,177.688 153.848,171.389 153.848,151.689 144.069,141.91 144.069,139.319 144.094,139.294 ; v1(153.42,137.44) 152.803,137.44 152.72,137.356 152.525,137.356 151.877,136.708 145.028,136.708 144.094,137.643 144.094,139.294
SD_CK: SD1.5 U11.55 | length 44
  SIG/PWR1 w0.2: v1(145.517,131.089) 145.567,131.14 147.906,131.14 148.187,130.859 U11.55@151.688,130.859
  SIG/PWR2 w0.2: v1(145.517,131.089) 145.44,131.013 145.44,130.733 145.009,130.302 145.009,129.642 144.653,129.286 144.653,126.111 146.076,124.688 146.076,104.339 146.091,104.323 146.161,104.253 146.228,104.186 146.228,104.056 146.353,103.931 146.53,103.931 146.672,104.073 146.848,104.073 147.025,103.896 147.025,103.719 146.347,103.041 146.347,102.864 146.523,102.687 146.7,102.687 147.409,103.396 147.586,103.396 147.762,103.219 147.762,103.042 147.054,102.334 147.054,102.157 147.231,101.98 147.521,101.98 147.646,101.855 147.646,101.651 SD1.5@147.646,98.479
SD_CMD: R49.1 SD1.3 U11.56 | length 47.3
  SIG/PWR1 w0.2: v1(143.76,129.536) 143.795,129.502 144.681,129.502 145.449,130.27 147.948,130.27 148.137,130.459 U11.56@151.688,130.459 ; v1(146.202,97.028) 146.202,96.99 146.482,96.711 R49.1@146.482,95.847
  SIG/PWR2 w0.2: v1(143.76,129.536) 143.76,129.428 143.586,129.254 143.586,124.866 144.856,123.596 144.856,107.126 144.856,106.969 145.006,106.819 145.156,106.669 145.156,106.369 145.006,106.219 144.879,106.219 144.729,106.069 144.729,105.769 144.879,105.619 145.25,105.619 145.4,105.469 145.4,105.169 145.25,105.019 144.879,105.019 144.729,104.869 144.729,104.569 144.879,104.419 145.318,104.419 145.468,104.269 145.468,103.969 145.318,103.819 144.879,103.819 144.729,103.669 144.729,103.369 144.879,103.219 145.318,103.219 145.468,103.069 145.468,102.769 145.318,102.619 145.006,102.619 144.856,102.469 144.856,101.769 145.184,101.441 145.271,101.441 145.654,101.058 145.654,100.223 145.446,100.015 SD1.3@145.446,98.479 145.446,97.327 145.669,97.105 146.126,97.105 v1(146.202,97.028)
SD_D0: R45.1 SD1.7 U11.57 | length 47.7
  SIG/PWR1 w0.2: v1(145.72,129.616) 145.742,129.638 147.853,129.638 148.274,130.059 U11.57@151.688,130.059 ; R45.1@148.234,95.86 v1(148.234,96.952)
  SIG/PWR2 w0.2: v1(145.72,129.616) 145.339,129.235 145.339,127.889 146.71,126.517 146.71,106.656 146.71,105.435 147.099,105.046 147.292,105.046 147.439,105.194 147.631,105.194 147.824,105.001 147.824,104.809 147.494,104.479 147.494,104.287 147.686,104.095 147.879,104.095 148.501,104.717 148.694,104.717 148.886,104.525 148.886,104.333 148.263,103.71 148.263,103.518 148.456,103.325 148.648,103.325 149.271,103.948 149.463,103.948 149.655,103.756 149.655,103.563 149.215,103.123 149.215,102.931 149.6,102.546 149.67,102.475 149.816,102.33 149.816,100.618 149.846,100.587 SD1.7@149.846,98.555 ; v1(148.234,96.952) 148.311,97.028 149.048,97.028 149.623,97.604 149.623,98.333 149.808,98.517 SD1.7@149.846,98.555 ; SD1.7@149.846,98.479 SD1.7@149.846,98.555
SD_D1: R46.1 SD1.8 U11.58 | length 47.3
  SIG/PWR1 w0.2: v1(146.609,128.981) 146.648,128.942 147.839,128.942 148.557,129.659 U11.58@151.688,129.659 ; R46.1@149.936,95.86 v1(149.936,96.952)
  SIG/PWR2 w0.2: v1(146.609,128.981) 147.142,128.448 147.142,126.721 147.599,126.263 147.599,107.978 147.599,106.87 148.327,106.142 148.52,106.142 149.08,106.703 149.273,106.703 149.465,106.511 149.465,106.318 148.815,105.668 148.815,105.475 149.007,105.283 149.199,105.283 149.876,105.96 150.068,105.96 150.26,105.767 150.26,105.575 149.584,104.898 149.584,104.706 149.776,104.514 149.968,104.514 150.645,105.19 150.837,105.19 151.03,104.998 151.03,104.806 150.443,104.219 150.443,104.027 150.828,103.642 150.898,103.571 151.124,103.346 151.124,100.847 150.946,100.669 SD1.8@150.946,98.479 150.946,97.428 150.47,96.952 v1(149.936,96.952)
SD_D2: R47.1 SD1.1 U11.53 | length 46.5
  SIG/PWR1 w0.2: R47.1@143.231,95.86 v1(143.231,96.952) ; v1(144.196,132.537) 147.694,132.537 148.572,131.659 U11.53@151.688,131.659
  SIG/PWR2 w0.2: v1(143.231,96.952) SD1.1@143.231,98.479 ; SD1.1@143.246,98.479 143.246,99.934 142.85,100.33 142.85,101.429 142.85,102.237 143.027,102.414 143.179,102.414 143.356,102.591 143.356,102.944 143.179,103.121 143.027,103.121 142.85,103.298 142.85,104.67 142.85,122.504 142.011,123.342 142.011,130.353 v1(144.196,132.537)
SD_D3: R48.1 SD1.2 U11.54 | length 46.8
  SIG/PWR1 w0.2: v1(144.875,131.812) 144.886,131.801 146.401,131.801 146.421,131.781 147.781,131.781 148.302,131.259 U11.54@151.688,131.259 ; R48.1@144.882,95.86 v1(144.882,96.952)
  SIG/PWR2 w0.2: SD1.2@144.346,98.479 144.346,100.815 143.891,101.27 143.891,101.706 143.891,102.406 144.041,102.556 144.157,102.556 144.307,102.706 144.307,103.006 144.157,103.156 143.914,103.156 143.764,103.306 143.764,103.606 143.914,103.756 144.116,103.756 144.266,103.906 144.266,104.206 144.116,104.356 143.914,104.356 143.764,104.506 143.764,104.806 143.914,104.956 144.041,104.956 144.191,105.106 144.191,105.406 144.041,105.556 143.891,105.706 143.891,108.315 143.891,123.063 142.799,124.155 142.799,129.845 143.764,130.81 144.475,130.81 144.798,131.133 144.798,131.735 v1(144.875,131.812) ; SD1.2@144.369,98.479 144.369,97.573 144.882,97.06 v1(144.882,96.952)
SPI_MISO: U10.2 U11.61 | length 11.4
  SIG/PWR1 w0.2: U10.2@143.51,125.754 143.51,125.239 144.2,124.549 145.605,124.549 146.533,125.476 146.533,126.781 146.65,126.898 147.437,126.898 148.998,128.459 U11.61@151.688,128.459
SPI_MOSI: U10.5 U11.62 | length 17.4
  SIG/PWR1 w0.2: U10.5@140.97,118.544 140.97,119.71 143.993,122.733 147.32,122.733 148.082,123.495 148.082,127.048 149.093,128.059 U11.62@151.688,128.059
SPI_NSS: R54.1 U10.1 U11.60 | length 10.4
  SIG/PWR1 w0.2: R54.1@143.675,127.61 143.675,127.585 144,127.26 144.025,127.26 144.603,126.682 144.78,126.505 U10.1@144.78,126.14 ; U10.1@144.78,125.754 144.78,125.857 U10.1@144.78,126.14 ; U11.60@151.688,128.859 148.824,128.859 147.249,127.285 146.157,127.285 145.241,126.369 144.97,126.369 144.78,126.179 U10.1@144.78,126.14
SPI_SCK: Q7.3 U10.6 U11.59 | length 28.6
  SIG/PWR1 w0.2: U10.6@142.24,118.544 142.24,117.551 141.986,117.297 140.589,117.297 140.284,117.602 140.284,121.869 139.133,123.02 Q7.3@138.303,123.02 138.582,123.299 138.582,124.091 138.867,124.376 138.867,124.401 139.242,124.776 139.242,126.251 139.217,126.276 139.217,127.254 140.538,128.575 144.145,128.575 145.078,127.641 147.111,127.641 148.729,129.259 U11.59@151.688,129.259
STM_OSC_IN: C22.2 R19.2 U5.13 X1.1 | length 15.1
  SIG/PWR1 w0.2: C22.2@122.332,152.024 122.369,152.024 X1.1@123.614,153.269 123.795,153.269 124.258,152.806 124.485,152.806 124.689,152.806 126.873,154.991 126.873,155.269 126.873,155.473 R19.2@126.329,156.018 126.851,156.54 128.409,156.54 129.471,157.602 129.471,158.02 U5.13@131.908,160.458
STM_OSC_OUT: C23.2 R19.1 U5.12 X1.3 | length 16.6
  SIG/PWR1 w0.2: C23.2@121.138,153.218 120.625,153.732 120.625,155.23 121.884,156.489 123.464,156.489 123.997,155.956 X1.3@124.038,155.956 125.196,157.114 R19.1@125.233,157.114 125.701,157.582 126.162,157.582 126.619,157.124 128.458,157.124 129.093,157.759 129.093,158.349 U5.12@131.555,160.812
STM_RST: C24.2 R20.1 SW1.2 TP1.1 U5.14 | length 202
  SIG/PWR1 w0.2: TP1.1@117.78,154.813 117.881,154.711 v1(117.881,152.248) ; R20.1@120.157,149.925 120.157,149.972 118.986,151.143 v1(117.881,152.248) ; v1(123.647,145.339) 118.11,145.339 115.951,147.498 115.951,150.317 v1(117.881,152.248) ; U5.14@132.262,160.105 U5.14@132.262,160.105 133.151,160.991 133.151,161.509 v1(133.217,161.576) ; v1(132.715,104.14) 132.746,104.171 151.911,104.171 156.642,99.441 156.642,87.274 159.483,84.433 202.149,84.433 214.496,96.78 221.454,96.78 222.311,97.638 v1(225.476,97.638)
  SIG/PWR2 w0.2: v1(117.881,152.248) 124.511,152.248 130.314,158.051 130.314,158.301 131.717,159.703 131.814,159.703 133.217,161.106 v1(133.217,161.576) ; v1(123.647,145.339) 123.724,145.262 124.206,145.262 126.619,142.85 126.619,110.236 v1(132.715,104.14) ; SW1.2@225.476,95.91 v1(225.476,97.638)
SVREF: C79.1 C80.2 R60.1 R63.2 U11.33 | length 8.4
  SIG/PWR1 w0.2: U11.33@156.763,135.534 156.763,136.102 157.048,136.388 157.048,137.291 157.001,137.338
  SIG/PWR1 w0.308: R60.1@155.804,138.608 C79.1@155.804,140.183 R63.2@155.804,141.808 ; C80.2@155.804,143.332 155.829,143.307 R63.2@155.829,141.808 ; R60.1@155.829,138.582 155.829,138.557 156.1,138.286 157.001,137.386 157.001,137.338
SWCLK: P2.2 R15.2 U5.76 | length 20.4
  SIG/PWR1 w0.2: P2.2@129.515,192.741 129.515,189.992 129.563,189.943 130.173,189.943 130.429,189.687 130.429,186.919 134.979,182.368 136.322,181.026 136.322,176.276 136.322,175.975 136.122,175.775 136.122,175.69 U5.76@136.151,175.661
SWDIO: P2.4 R16.2 U5.72 | length 22.4
  SIG/PWR1 w0.2: P2.4@134.595,192.741 R16.2@134.595,189.967 134.694,189.867 135.227,189.867 135.814,189.281 135.814,185.309 137.668,183.455 137.668,174.6 138.405,173.863 138.949,173.863 U5.72@139.687,174.6
SWO: P2.3 R14.2 U5.89 | length 29.2
  SIG/PWR1 w0.2: U5.89@131.555,171.065 132.338,170.282 132.817,170.282 137.135,174.6 137.135,181.788 131.039,187.884 131.039,189.586 131.42,189.967 R14.2@132.055,189.967 P2.3@132.055,192.741
TEST: R17.2 U5.67 | length 31.4
  SIG/PWR1 w0.254: U5.67@141.454,172.832 145.786,177.164 148.485,177.164 157.455,186.133 157.455,193.332 R17.2@155.55,195.237
TX: TP23.1 U5.68 U11.41 | length 72.3
  SIG/PWR1 w0.2: U5.68@141.101,173.186 145.797,177.883 148.241,177.883 v1(148.26,177.902) ; TP23.1@143.891,142.342 144.043,142.494 146.278,142.494 v1(146.355,142.57) ; U11.41@153.563,135.534 153.563,136.05 154.104,136.591 v1(154.104,136.627)
  SIG/PWR2 w0.2: v1(146.355,142.57) 146.279,142.494 145.237,142.494 ; v1(148.26,177.902) 154.229,171.933 154.229,151.486 145.237,142.494 ; v1(154.104,136.627) 154.104,136.735 154.28,136.911 154.28,137.592 153.746,138.125 152.798,138.125 151.732,137.058 145.444,137.058 144.653,137.849 144.653,141.91 145.237,142.494
USB1_N: U5.70 U8.6 | length 17.6
  SIG/PWR1 w0.199: U5.70@140.394,173.893 140.394,173.965 148.387,181.958 148.387,183.667 148.387,186.207 148.387,186.461 149.083,187.157 U8.6@149.083,187.916
USB1_P: U5.71 U8.4 | length 17.6
  SIG/PWR1 w0.199: U5.71@140.04,174.247 140.112,174.247 147.988,182.123 147.988,186.454 147.87,186.572 147.8,186.642 147.635,186.642 147.588,186.595 147.447,186.595 147.306,186.736 147.306,186.877 147.353,186.924 147.353,187.089 147.269,187.173 147.197,187.245 147.197,187.901 U8.4@147.183,187.916
USB2_N: U9.6 U11.68 | length 38.4
  SIG/PWR1 w0.167: v1@150.267,122.936 150.952,123.622 151.353,123.622 151.426,123.694 151.573,123.694 152.763,124.884 U11.68@152.763,125.784
  SIG/PWR2 w0.199: v1(150.114,122.682) 150.114,122.641 150.39,122.365 150.39,109.452 163.068,96.774 165.021,96.774 165.567,97.32 U9.6@165.567,97.53
USB2_P: U9.4 U11.69 | length 38.6
  SIG/PWR1 w0.167: v1(151.028,122.654) 151.028,122.701 153.163,124.836 U11.69@153.163,125.784
  SIG/PWR2 w0.199: v1(151.028,122.654) 151.028,122.65 150.739,122.36 150.739,109.662 158.958,101.443 159.787,100.614 159.985,100.614 160.3,100.929 160.498,100.929 160.794,100.633 160.794,100.435 160.446,100.087 160.446,99.889 160.743,99.593 160.94,99.593 161.289,99.941 161.486,99.941 161.783,99.644 161.783,99.447 161.435,99.099 161.435,98.901 161.731,98.604 161.929,98.604 162.277,98.952 162.475,98.952 162.771,98.656 162.771,98.458 162.456,98.143 162.456,97.945 162.871,97.53 163.17,97.53 U9.4@163.667,97.53
VBAT: P1.2 Q2.3 R3.2
VBATRTC: C27.2 TP2.1 U5.6 U6.3 | length 13.9
  SIG/PWR1 w0.254: TP2.1@117.729,157.81 120.379,157.81 122.156,159.587 122.683,159.587 U6.3@122.825,159.445 122.956,159.445 C27.2@124.77,161.259 125.558,162.047 128.548,162.047 U5.6@129.434,162.933
VDDA: C25.2 C26.2 R22.2 R23.1 U5.19 U5.22 | length 18.9
  SIG/PWR1 w0.2: R22.2@127.192,151.424 127.192,151.475 C25.2@128.315,152.598 127.813,153.1 127.813,154.076 129.972,156.235 131.068,156.235 131.52,155.784 131.527,155.784 131.527,155.834 U5.19@134.03,158.337 134.595,158.902 135.077,158.902 135.712,158.267 135.712,157.898 U5.22@135.091,157.276 134.098,156.284 134.098,155.231 R23.1@133.187,154.32
VLED+: C59.2 LCD1.1 LCD1.2 R5.1 U2.4 | length 9
  SIG/PWR1 w0.254: 169.169,164.993 169.169,158.976 LCD1.2@169.192,158.953
  SIG/PWR1 w0.508: C59.2@167.132,155.905 167.132,156.083 168.91,157.861 168.91,158.166
VLED-: C59.1 L2.2 LCD1.3 LCD1.4 | length 2.8
  SIG/PWR1 w0.508: C59.1@168.656,155.905 168.656,156.54 169.951,157.836 169.951,158.14
VREF+: R23.2 R24.2 U5.21 | length 7.1
  SIG/PWR1 w0.2: R24.2@130.977,152.11 R23.2@132.091,153.224 132.073,153.241 132.073,154.451 133.502,155.88 133.502,156.395 U5.21@134.737,157.63
VREF-: C25.1 C26.1 R24.1 R25.2 U5.20 | length 5.8
  SIG/PWR1 w0.2: C26.1@130.449,154.706 130.542,154.613 131.677,154.613 132.763,155.7 132.763,156.353 133.397,156.986 133.397,156.996 U5.20@134.383,157.983